# Altium PCB PCB LED_MonitorFluorecente.PcbDoc
Units mm, origin at the board's own origin, x right, y up, seen from the top; angles counter-clockwise.
Board outline 44.5 x 44.5 mm, 2 copper layers (Top Layer, Bottom Layer); 24 components, 3 nets, 82 pads, 13 vias.
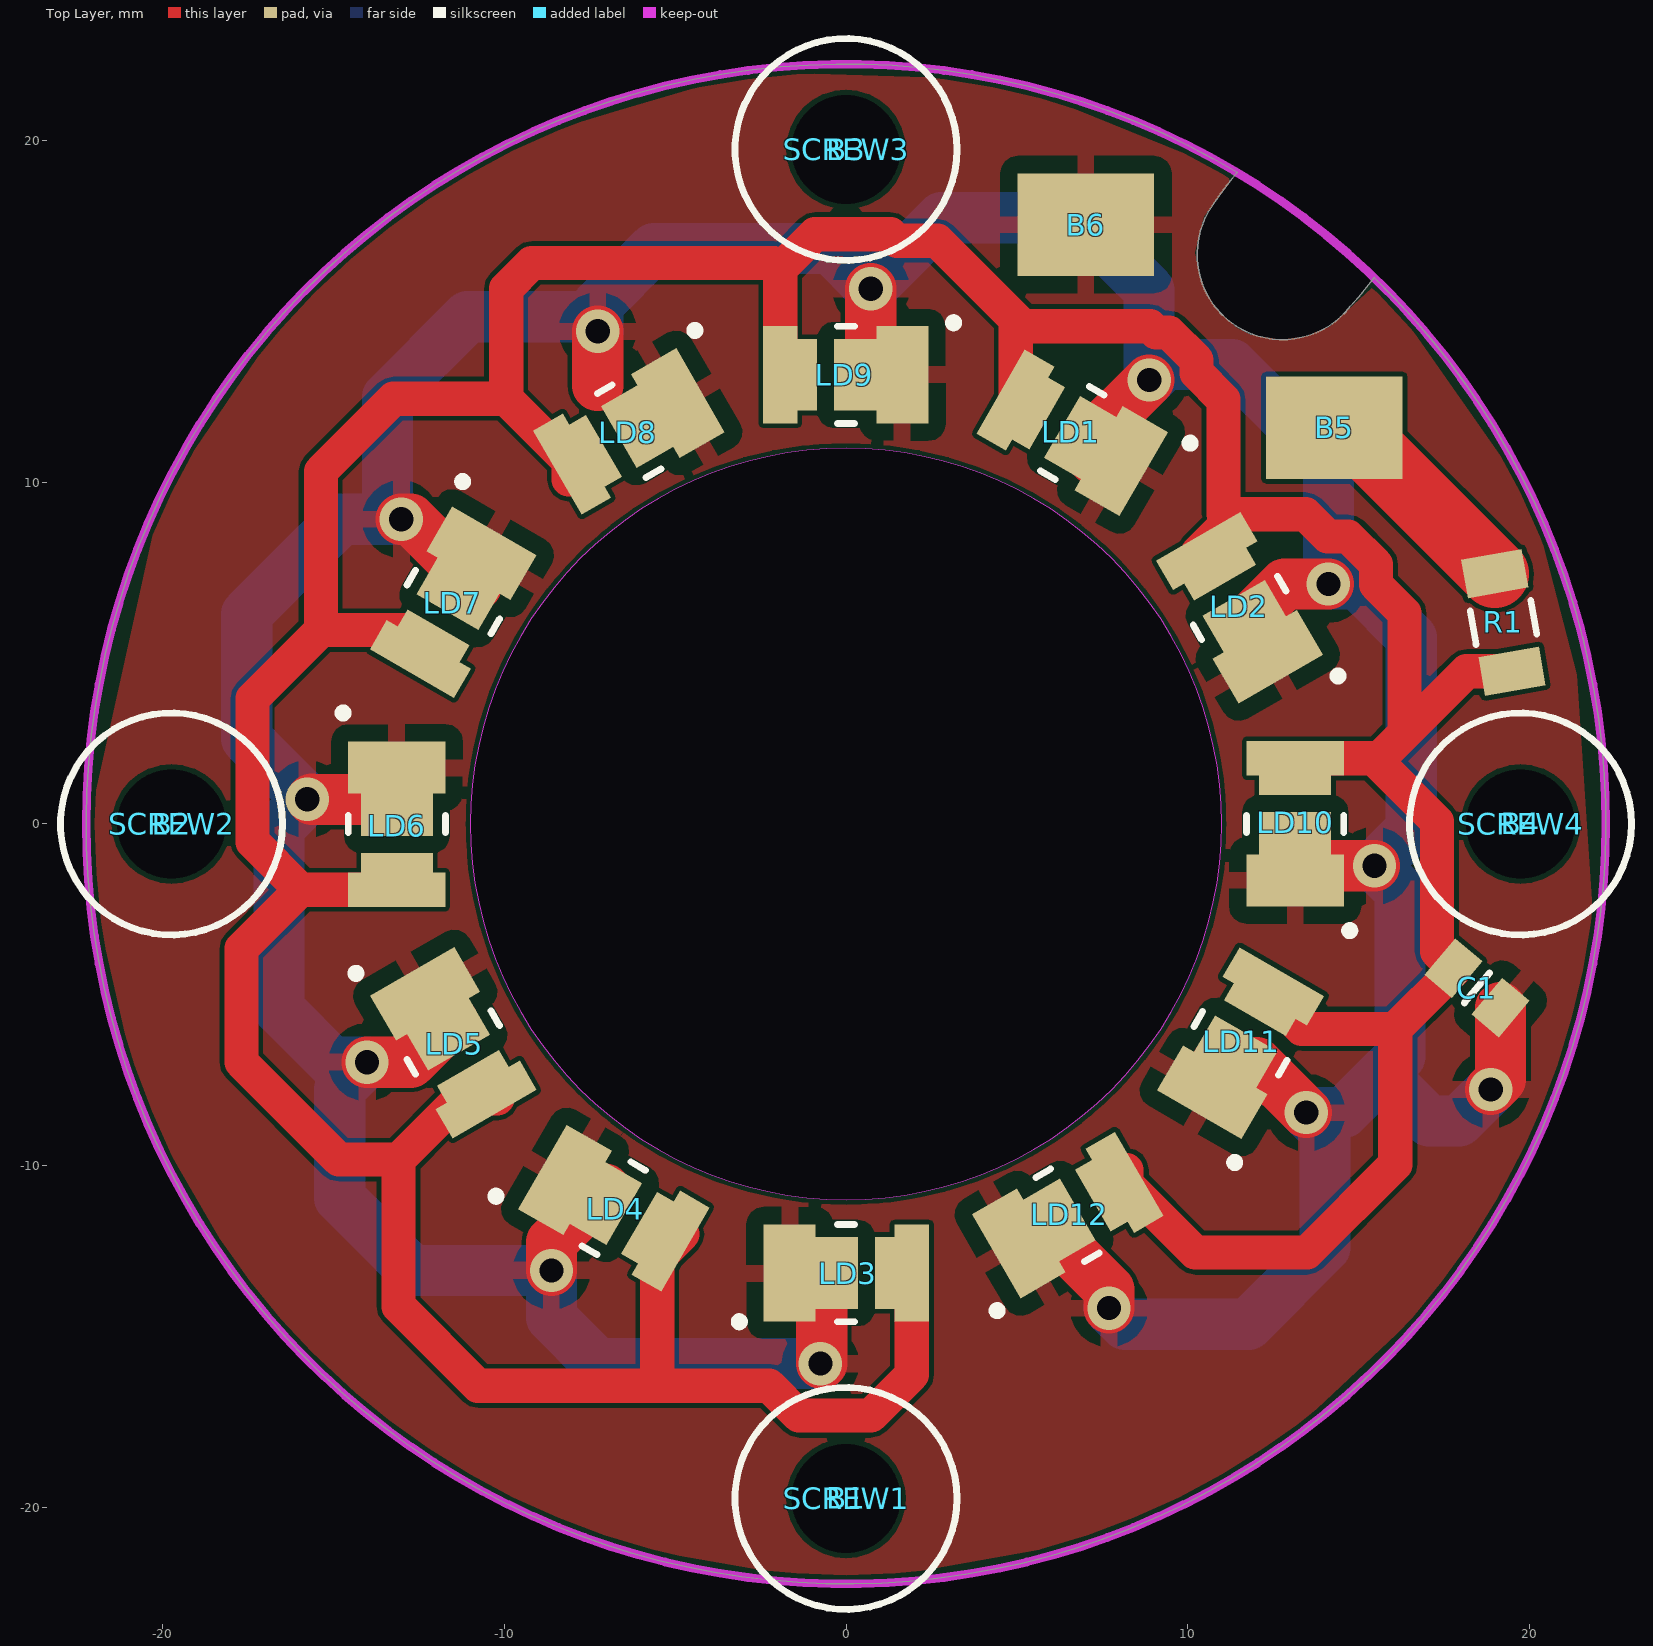
[diagram p0: Top Layer view]
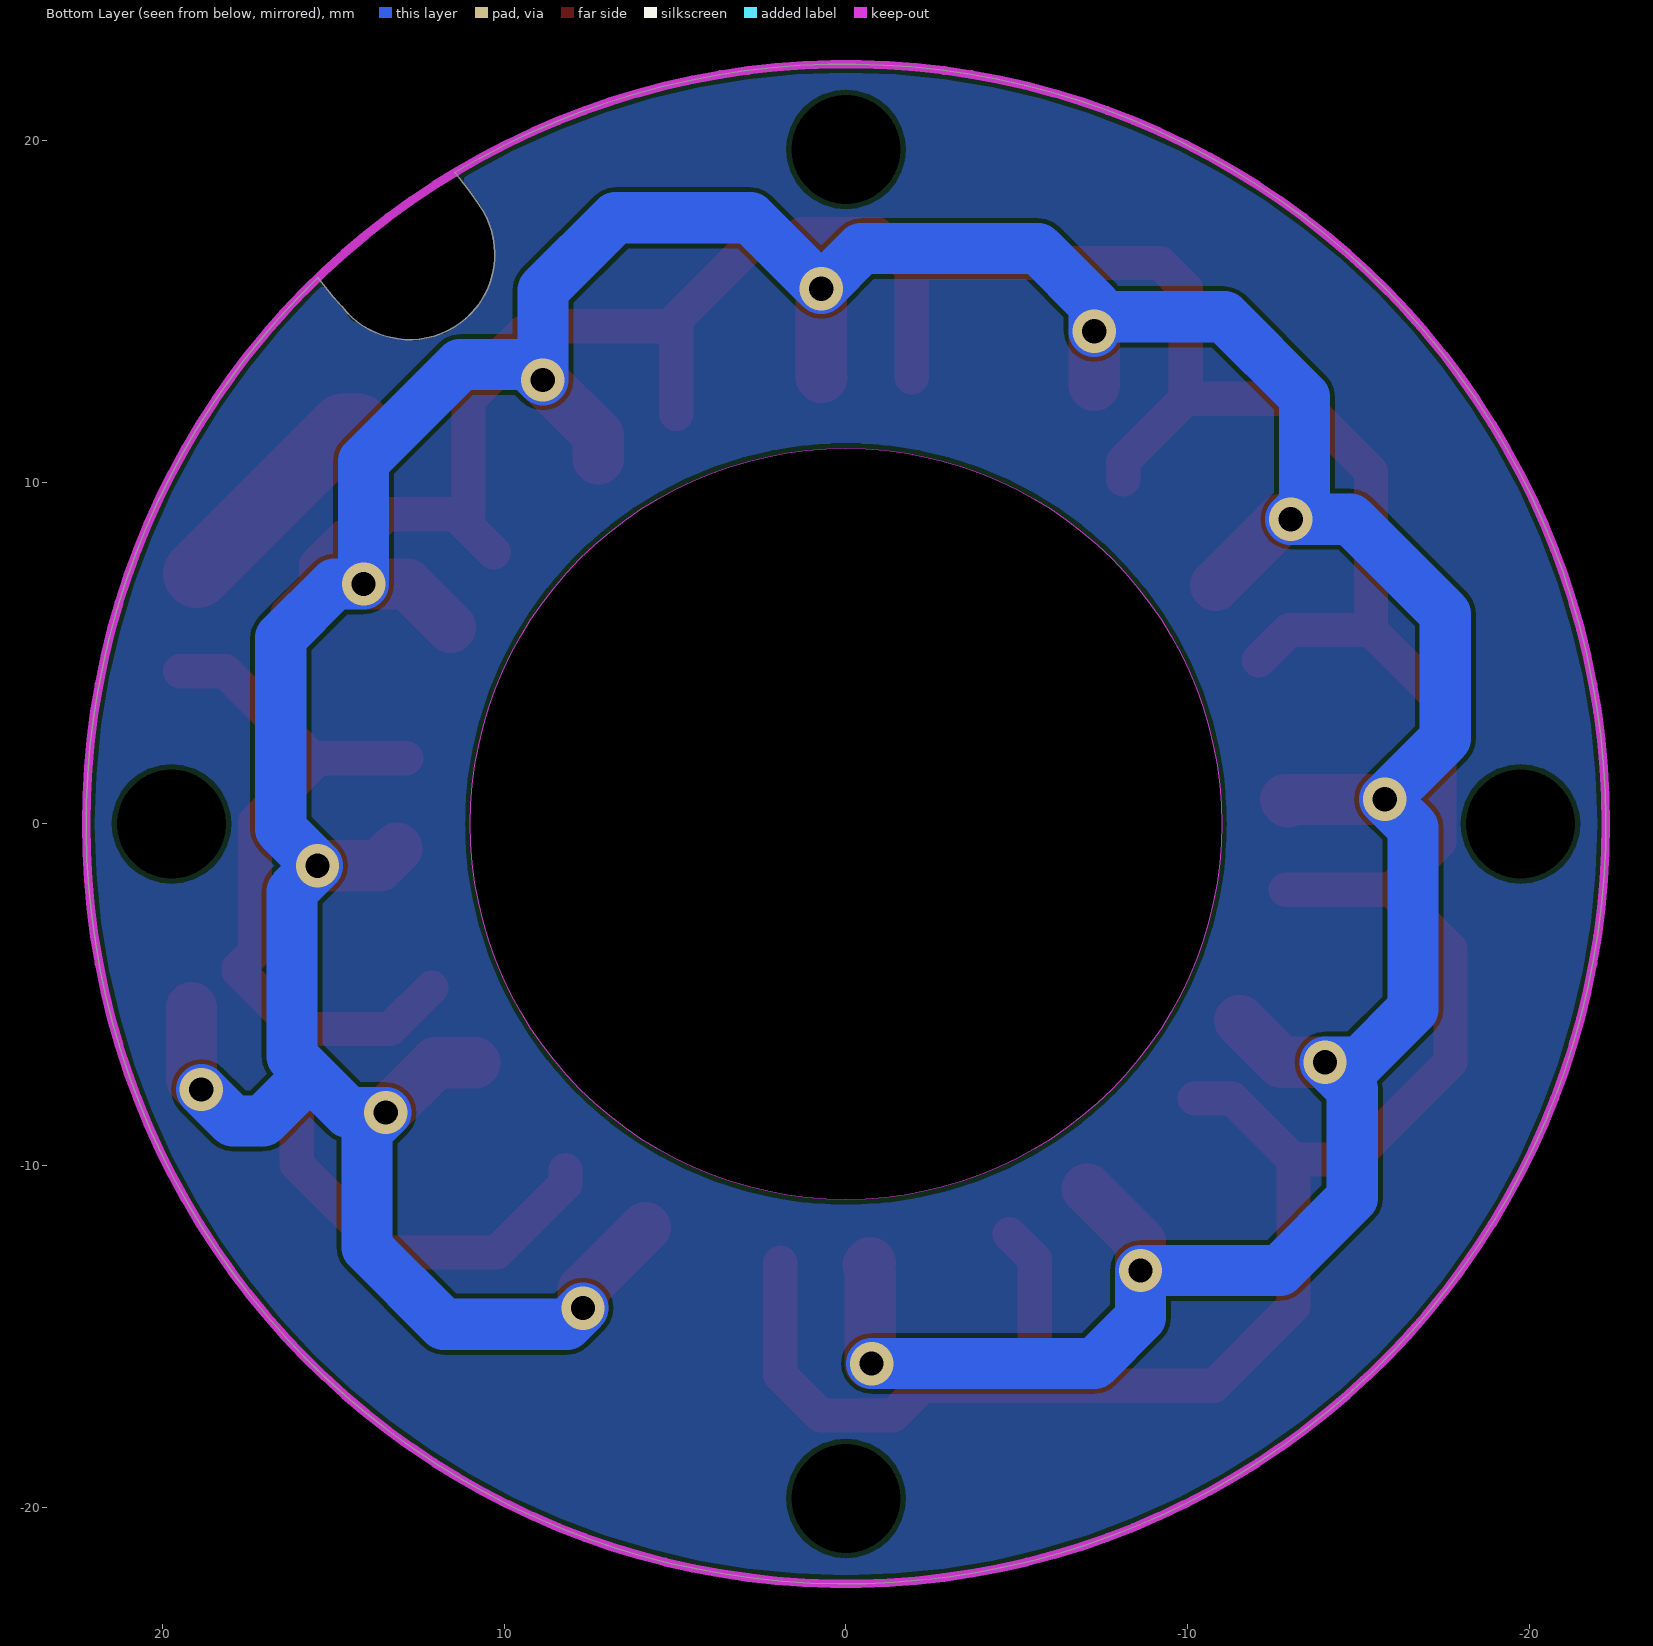
[diagram p1: Bottom Layer view, seen from below]

## Layer stack, top to bottom
Top Solder: solder mask 0.0102, Solder Resist, Dk 3.5
Top Layer: signal copper 0.0356
Dielectric 1: dielectric 0.32, FR-4, Dk 4.8
Bottom Layer: signal copper 0.0356
Bottom Solder: solder mask 0.0102, Solder Resist, Dk 3.5

## Board outline
11.457,19.074 ccw(c0,0) 15.46,16.001 15.464,16.004 cw(c7.889,21.555) 14.769,15.163 14.768,15.164 cw(c12.78,16.68) 10.744,18.131 cw(c19.776,12.122)
cut-out: -11,0 ccw(c0,0) 0,-11 ccw(c0,0) 11,0 ccw(c0,0) 0,11 ccw(c0,0)

## Design rules (kind name [scope] priority, off if disabled: settings)
BoardOutlineClearance SilkOverlay [OnLayer('Top Overlay')] p1 off: gap=-1000 ignorepadtopadclearanceinfootprint=FALSE
BoardOutlineClearance [All] p2 off: gap=0.254 ignorepadtopadclearanceinfootprint=FALSE except(0: Arc-SplitContinuation Track-SplitContinuation SMDPad-SplitContinuation THPad-SplitContinuation Via-SplitContinuation Fill-SplitContinuation Poly-SplitContinuation Region-SplitContinuation Text-SplitContinuation; 0.75: SMDPad-OutlineEdge SMDPad-CavityEdge SMDPad-CutoutEdge SMDPad-SplitBarrior)
Clearance [All] p1: gap=0.13 ignorepadtopadclearanceinfootprint=FALSE
HoleSize [All] p1: absolutevalues=TRUE maxlimit=254 minlimit=0.305 maxpercent=80.000 minpercent=20.000
MinimumAnnularRing [All] p1: minimumring=0.16
PlaneConnect [All] p1: planeconnectstyle=Relief reliefexpansion=0.508 reliefentries=4 reliefconductorwidth=0.5 reliefairgap=0.5
PolygonConnect [All] p1: connectstyle=Relief reliefconductorwidth=0.5 reliefentries=4 polygonreliefangle="90 Angle" airgapwidth=0.5
RoutingVias [All] p1: holewidth=0.711 width=1.27 viastyle="Through Hole" minholewidth=0.711 minwidth=1.27 maxholewidth=0.711 maxwidth=1.27
SolderMaskExpansion [All] p1: expansion=0.102
Width [All] p1: maxlimit=3 minlimit=0.3 preferedwidth=0.5
28 further rules are at their usual default settings.

## Components (designator, comment, footprint, x,y, rotation, side; value= is the part's Value field where it differs from the comment)
B1 "Plated Hole" MTG320_1050 0,-19.75 r0 top
B2 "Plated Hole" MTG320_1050 -19.75,0 r0 top
B3 "Plated Hole" MTG320_1050 0,19.75 r0 top
B4 "Plated Hole" MTG320_1050 19.75,0 r0 top
B5 "SMD Pad" R400X300#1 14.3,11.6 r0 top
B6 "SMD Pad" R400X300#2 9.271,16.637 r0 top
C1 "100nF" CAPC2012X135N 18.475,-4.8 r320 top
LD1 "White" LED_OSRAM_GW_JTLPS1.EM 6.625,11.45 r150 top
LD2 "White" LED_OSRAM_GW_JTLPS1.EM 11.525,6.325 r120 top
LD3 "White" LED_OSRAM_GW_JTLPS1.EM 0,-13.15 r0 top
LD4 "White" LED_OSRAM_GW_JTLPS1.EM -6.8,-11.25 r330 top
LD5 "White" LED_OSRAM_GW_JTLPS1.EM -11.5,-6.4 r300 top
LD6 "White" LED_OSRAM_GW_JTLPS1.EM -13.15,0 r270 top
LD7 "White" LED_OSRAM_GW_JTLPS1.EM -11.5,6.5 r240 top
LD8 "White" LED_OSRAM_GW_JTLPS1.EM -6.35,11.5 r210 top
LD9 "White" LED_OSRAM_GW_JTLPS1.EM 0,13.15 r180 top
LD10 "White" LED_OSRAM_GW_JTLPS1.EM 13.15,0 r90 top
LD11 "White" LED_OSRAM_GW_JTLPS1.EM 11.55,-6.425 r60 top
LD12 "White" LED_OSRAM_GW_JTLPS1.EM 6.488,-11.456 r30 top
R1 "10" RESC3216X65N 19.25,5.9 r100 top
SCREW1 "M3x6" BOSSARD_BN1061-1401173_v 0,-19.75 r0 top
SCREW2 "M3x6" BOSSARD_BN1061-1401173_v -19.75,0 r0 top
SCREW3 "M3x6" BOSSARD_BN1061-1401173_v 0,19.75 r0 top
SCREW4 "M3x6" BOSSARD_BN1061-1401173_v 19.75,0 r0 top

## Footprints (in the part's own frame and the unit in brackets; to place one, negate y for a bottom-side part, rotate by r counter-clockwise, add the part's x,y. Pads: shape width x height; smd on the part's side, far side on the other; paste and mask are expansions set on the pad)
BOSSARD_BN1061-1401173_v [mm] "M3 L=6mm Slotted Pan Head Machine Screw - Polyamide PA 6.6"
  silkscreen extent -3.25,-3.25 3.25,3.25, body extent -2.75,-2.75 2.75,2.75, height 2
CAPC2012X135N [mm] "Chip Capacitor, Body 2.0x1.25mm, IPC Medium Density"
  rect 1.05x1.4 smd: 1(-0.9,0) 2(0.9,0)
  silkscreen extent 0,-0.57 0,0.57, body extent -1.05,-0.67 1.05,0.68, height 1.25
LED_OSRAM_GW_JTLPS1.EM [mm] "SMD White LED, 2-Leads, Body 3.5x2.8mm, GW JTLPS1.EM Series"
  rect 0.14x1.15 smd paste-10: 1(-1.825,0)
  rect 1.525x2.85 smd paste-10 mask-10: 1(-1.65,0)
  rect 2.12x2.1 smd paste-10: 1(-0.713,0)
  rect 0.92x2.1 smd paste-10: 2(1.312,0)
  rect 0.12x1.15 smd paste-10: 2(1.825,0)
  rect 1x2.85 smd paste-10 mask-10: 2(1.925,0)
  silkscreen extent -3.26,-1.59 0.25,1.43, body extent -1.75,-1.43 1.75,1.43, height 0.65
MTG320_1050 [mil] "Plated Through Hole: Hole Dia.=3.2mm Pad Dia.=10.5mm"
  round 60 hole 125.98: 2(0,0)
R400X300#1 [mm] "4mm x  3mm SMD Pad"
  rect 4x3 smd paste-1.5: 1(0,0)
R400X300#2 [mm] "4mm x  3mm SMD Pad"
  rect 4x3 smd paste-1.5: 1(-2.246,0.913)
RESC3216X65N [mm] "Chip Resistor, EIA 1206, Metric 3216, Body 3.2x1.6mm, IPC Medium Density"
  rect 1.15x1.8 smd: 1(-1.45,0) 2(1.45,0)
  silkscreen extent -0.5,-0.9 0.5,0.9, body extent -1.67,-0.87 1.68,0.88, height 0.65

## Part data
B1 B2 B3 B4: library part PLATED_HOLE3.2_PAD10.5, "Single Terminal Socket", Author="CERN DEM JMW", ComponentHeight=0mm, Component Type="Standard (No BOM)", CreateDate=27/09/2011, Family="Plated Hole", HelpURL=Undefined, LatestRevisionDate=27/09/2011, Mounted=No, PackageDescription="Plated Through Hole: Hole Dia.=3.2mm Pad Dia.=10.5mm", Part Description="Plated Through Hole: Hole Dia.=3.2mm Pad Dia.=10.5mm", Part Number=PLATED_HOLE3.2_PAD10.5, Pin Count=1, Sense=No, SMD=No, Socket=No, Status=None
B5 B6: library part SMD_PAD_4X3MM, "Single SMD Pad", Author="CERN DEM JLC", ComponentHeight=0mm, Component Type="Standard (No BOM)", CreateDate=15/03/2010, Family="SMD Pad", HelpURL=Undefined, LatestRevisionDate=15/03/2010, Mounted=No, PackageDescription="4mm x  3mm SMD Pad", Part Description="4mm x 3mm SMD Pad", Part Number=SMD_PAD_4X3MM, Pin Count=1, Sense=No, SMD=No, Socket=No, Status=None
C1: library part CC0805_100NF_50V_10%_X7R, "Non-polarised capacitor", Case=0805, Manufacturer=GENERIC, Manufacturer1 ComponentHeight=1mm, Manufacturer1 Example=TDK, Manufacturer1 Part Number=C2012X7R1H104K085AA, Tolerance=±10%, Voltage=50V, Author="CERN DEM JLC", Component Type=Standard, CreateDate=03/12/2007, HelpURL=\\cern.ch\dfs\Applications\Altium\Datasheets\CC0805_X7R_TDK_C.pdf, LatestRevisionDate=22/04/2015, Manufacturer Part Number=CC0805_100NF_50V_10%_X7R, Mounted=Yes, Part Description="SMD Multilayer Chip Ceramic Capacitor", Part Number=CC0805_100NF_50V_10%_X7R, Pin Count=2, Sense=No, SMD=Yes, Socket=No, Status=Preferred, TC=X7R
LD1 LD2 LD3 LD4 LD5 LD6 LD7 LD8 LD9 LD10 LD11 LD12: library part "GW JTLPS1.EM-KKKM-XX55-1-150-R33", "LED White 1C 2A", Manufacturer=OSRAM, Author="LNLS DIG LOS", Bonding=No, Color=White, ComponentHeight=0.65mm, Component Type=Standard, CreateDate=26/02/2018, LatestRevisionDate=26/02/2018, Manufacturer Part Number="GW JTLPS1.EM-KKKM-XX55-1-150-R33", Mounted=Yes, PackageDescription="SMD White LED, 2-Leads, Body 3.5x2.8mm, GW JTLPS1.EM Series", Part Description="High Power LEDs - White White 4000K CRI 80 DURIS E 2835", Part Number="GW JTLPS1.EM-KKKM-XX55-1-150-R33", Pin Count=2, PressFit=No, Sense=No, SMD=Yes, Socket=No
R1: library part R1206_10R_1%_0.25W_200PPM, "Resistor - 1%", Case=1206, Manufacturer=GENERIC, Manufacturer1 ComponentHeight=0.65mm, Manufacturer1 Example="NIC COMPONENT", Manufacturer1 Part Number=NRC12F10R0TRF, Power=0.25W, Tolerance=±1%, Author="CERN DEM JLC", Component Type=Standard, CreateDate=24/06/2009, HelpURL=\\cern.ch\dfs\Applications\Altium\Datasheets\R1206_NIC_NRC.pdf, LatestRevisionDate=24/06/2009, Manufacturer Part Number=R1206_10R_1%_0.25W_200PPM, Mounted=Yes, Part Description="General Purpose Thick Film Chip Resistor", Part Number=R1206_10R_1%_0.25W_200PPM, Pin Count=2, Sense=No, SMD=Yes, Socket=No, Status=Preferred, TC=±200ppm/°C
SCREW1 SCREW2 SCREW3 SCREW4: library part BOSSARD_BN1061-1401173_v, "Slotted Pan Head Screw", Manufacturer=BOSSARD, Manufacturer Part Number="BN1061 Art.1401173", Author="CERN DEM JMW", ComponentHeight=2mm, Component Type=Mechanical, CreateDate=18/06/2015, HelpURL=\\cern.ch\dfs\Applications\Altium\Datasheets\BOSSARD_BN1061-1401173.pdf, LatestRevisionDate=18/06/2015, Mounted=Yes, PackageDescription="M3 L=6mm Slotted Pan Head Machine Screw, Polyamide PA 6.6", Part Description="M3 L=6mm Slotted Pan Head Machine Screw, Polyamide PA 6.6", Part Number=BOSSARD_BN1061-1401173_v, Pin Count=0, PressFit=No, Sense=No, SMD=No, Socket=No, Status=None

## Via types
v1: diameter 1.27, hole 0.711, Top Layer to Bottom Layer, tented both sides, 13 vias

## Nets (pads, with @x,y where several pads share a name; then routed paths per layer and width w, separated by ;. In a path a pad name is that pad's centre, name@x,y a point inside that pad or via, vN(x,y) a via of type N, cw(c..) or ccw(c..) an arc to the next point about the centre after c; other vN are vias at no path point)
5VCC: B5.1 R1.2 | length 6.5
  Top Layer w2: B5.1 14.726,11.6 R1.2
GND: B6.1 C1.2 LD1.1 LD2.1 LD3.1 LD4.1 LD5.1 LD6.1 LD7.1 LD8.1 LD9.1 LD10.1 LD11.1 LD12.1 | length 157.2
  Top Layer w1.5: v1@-15.637,0.725 -15.637,0.713 LD6.1@-13.15,0.713 ; v1(-14.025,-6.975) -12.748,-6.975 LD5.1@-11.531,-5.758 ; v1(-13.025,8.925) -12.752,8.925 LD7.1@-10.819,6.992 ; LD6.1@-13.004,0.717 -12.938,0.65 LD6.1@-12.875,0.713 ; v1(-8.625,-13.075) -8.625,-12.246 LD4.1@-7.067,-10.688 ; -7.271,12.838 v1(-7.271,14.425) ; v1@-0.713,-15.8 LD3.1@-0.713,-13.15 ; LD3.1@-0.713,-12.85 LD3.1@-0.65,-12.912 ; LD9.1@0.713,13.075 0.725,13.087 v1(0.725,15.675) ; LD12.1@5.871,-11.813 7.7,-13.641 v1(7.7,-14.175) ; LD1.1@7.254,10.687 7.254,11.379 v1(8.875,13) ; LD11.1@10.869,-6.992 12.017,-6.992 v1(13.475,-8.45) ; LD2.1@11.581,5.758 12.848,7.025 v1(14.125,7.025) ; LD10.1@13.15,-0.713 13.662,-1.225 v1(15.475,-1.225) ; v1(18.875,-7.775) 19.164,-7.486 C1.2
  Bottom Layer w1.5: v1@-7.696,14.85 -11.075,14.85 -13.425,12.5 -13.425,9.325 v1(-13.025,8.925) -14.775,8.925 -17.55,6.15 -17.55,2.5 v1(-15.775,0.725) -16.6,-0.1 -16.6,-5.425 -15.05,-6.975 v1(-14.025,-6.975) -14.825,-7.775 -14.825,-10.95 -12.7,-13.075 v1(-8.625,-13.075) -8.625,-14.45 -7.275,-15.8 v1(-0.75,-15.8) ; v1(-7.271,14.425) -7.271,15.204 -5.625,16.85 -0.45,16.85 v1(0.725,15.675) 2.8,17.75 6.75,17.75 8.875,15.625 v1(8.875,13) 9.325,13.45 11.3,13.45 14.125,10.625 v1(14.125,7.025) 14.975,7.025 16.55,5.45 16.55,-0.15 v1(15.475,-1.225) 16.225,-1.975 16.225,-6.8 15.7,-7.325 ; v1(7.7,-14.175) 8.175,-14.65 11.775,-14.65 14.025,-12.4 14.025,-9 v1(13.475,-8.45) 14.575,-8.45 15.7,-7.325 ; v1(18.875,-7.775) 17.95,-8.7 17.075,-8.7 15.7,-7.325
NetC1_1: C1.1 LD1.2 LD2.2 LD3.2 LD4.2 LD5.2 LD6.2 LD7.2 LD8.2 LD9.2 LD10.2 LD11.2 LD12.2 R1.1 | length 158.2
  Top Layer w1: LD6.2@-12.875,-1.925 -15.975,-1.925 ; LD7.2@-12.087,4.795 -12.968,5.675 -15.375,5.675 ; LD5.2@-10.212,-8.042 -11.317,-8.042 -13.1,-9.825 ; LD8.2@-8.117,10.081 -8.117,10.617 -9.95,12.45 ; -5.525,-16.275 -5.525,-12.749 LD4.2@-4.783,-12.006 ; LD9.2@-1.925,13.075 -1.925,16.25 ; LD3.2@1.925,-12.85 1.925,-16.125 0.725,-17.325 -1.375,-17.325 -2.25,-16.45 -10.775,-16.45 -13.1,-14.125 -13.1,-9.825 ; LD1.2@4.97,12.006 4.97,14.78 2.675,17.075 1.494,17.075 1.302,17.267 -0.908,17.267 -1.925,16.25 ; 4.97,14.575 8.9,14.575 9.083,14.392 9.452,14.392 10.267,13.577 10.267,13.208 11.05,12.425 11.05,9.068 13.457,9.068 14.108,8.417 14.702,8.417 15.517,7.602 15.517,7.008 16.35,6.175 16.35,2.65 ; LD12.2@8.217,-10.131 8.217,-10.542 10.225,-12.55 13.5,-12.55 16.082,-9.968 16.082,-6 ; LD2.2@10.312,7.955 11.425,9.068 ; LD11.2@12.137,-4.795 13.343,-6 16.082,-6 ; LD10.2@12.875,1.925 15.625,1.925 ; R1.1 18.172,4.472 15.625,1.925 ; -15.975,-1.925 -17.375,-0.525 -17.375,3.675 -15.375,5.675 ; -15.975,-1.925 -17.7,-3.65 -17.7,-6.975 -14.85,-9.825 -13.1,-9.825 ; -15.375,5.675 -15.375,10.325 -13.25,12.45 -9.95,12.45 ; -9.95,12.45 -9.95,15.675 -9.2,16.425 -2.1,16.425 -1.925,16.25 ; 15.625,1.925 15.625,1.745 17.3,0.07 17.3,-3.736 C1.1 17.786,-4.296 16.082,-6
pads on no net: B1.2 B2.2 B3.2 B4.2

## Polygon pours and split planes (outlines as drawn)
GND on Top Layer "GND_L01_P000" (solid, remove dead copper, pour order 9): -22.342,-0.732 -20.074,9.481 -16.155,15.227 -10.522,19.753 -6.644,20.893 -2.803,22.022 4.629,21.783 11.404,19.02 10.786,18.193 10.481,17.785 10.35,17.268 10.211,16.719 10.329,16.186 10.481,15.699 10.744,15.229 11.088,14.839 11.457,14.516 11.862,14.318 12.75,14.18 13.461,14.275 14.165,14.56 15.593,15.868 20.074,9.481 21.399,4.375 21.916,-3.54 20.5,-8.15 18.235,-12.661 16.114,-14.948 13.648,-17.248 10.638,-19.485 7.353,-20.947 0.004,-22.263 -6.983,-21.073 -12.15,-18.708 -17.301,-13.911 -20.637,-8.189
no net on Bottom Layer "Bottom Layer-No Net" (solid, pour order 11): 0.1,22.175 4.737,21.689 9.317,20.15 11.371,19.074 10.7,18.131 10.455,17.598 10.304,17.028 10.25,16.475 10.397,15.924 10.6,15.375 11,14.925 11.7,14.375 12.574,14.151 13.541,14.298 14.491,14.743 15.457,16.004 17.853,13.195 19.056,11.389 20.742,7.912 21.827,4.055 22.2,0.075 22.2,0 21.69,-4.731 20.25,-9.098 18.078,-12.885 15.28,-16.105 11.838,-18.781 8.124,-20.66 4.103,-21.817 -0.025,-22.225 -4.65,-21.708 -9.147,-20.228 -13.308,-17.769 -16.62,-14.718 -19.098,-11.319 -20.885,-7.528 -21.775,-3.8 -22.15,-0.1 -22.15,0.2 -21.721,4.585 -20.192,9.226 -17.932,13.087 -15.024,16.344 -11.739,18.842 -7.976,20.718 -5.036,21.621 -1.975,22.175 0.1,22.075

## Keep-outs
Keep-Out Layer:
  circle w0.013: c0,0 r11
  circle w0.254: c0,0 r22.25

## Silkscreen, mask and mechanical layers (free items; w line width, h text height)
Mechanical 1:
  circle w0.013: c0,0 r11
  circle w0.013: c-19.75,0 r1.6
  circle w0.013: c0,19.75 r1.6
  circle w0.013: c19.75,0 r1.6
  circle w0.013: c0,-19.75 r1.6
  lines w0.013: 11.452,19.078 ccw(c19.776,12.122) 10.744,18.131 ccw(c12.78,16.68) 14.768,15.164 ; 11.457,19.074 ccw(c0,0) 15.46,16.001 ; 14.769,15.163 ccw(c7.889,21.555) 15.464,16.004